# Altium PCB 主板-双BH.PcbDoc (part 4 of 4)
Units mm, origin at the board's own origin, x right, y up, seen from the top; angles counter-clockwise.
Board outline 97.69 x 103.45 mm, 2 copper layers (Top Layer, Bottom Layer); 79 components, 77 nets, 266 pads, 287 vias.
Unrouted connection lines stored in the file: 7.
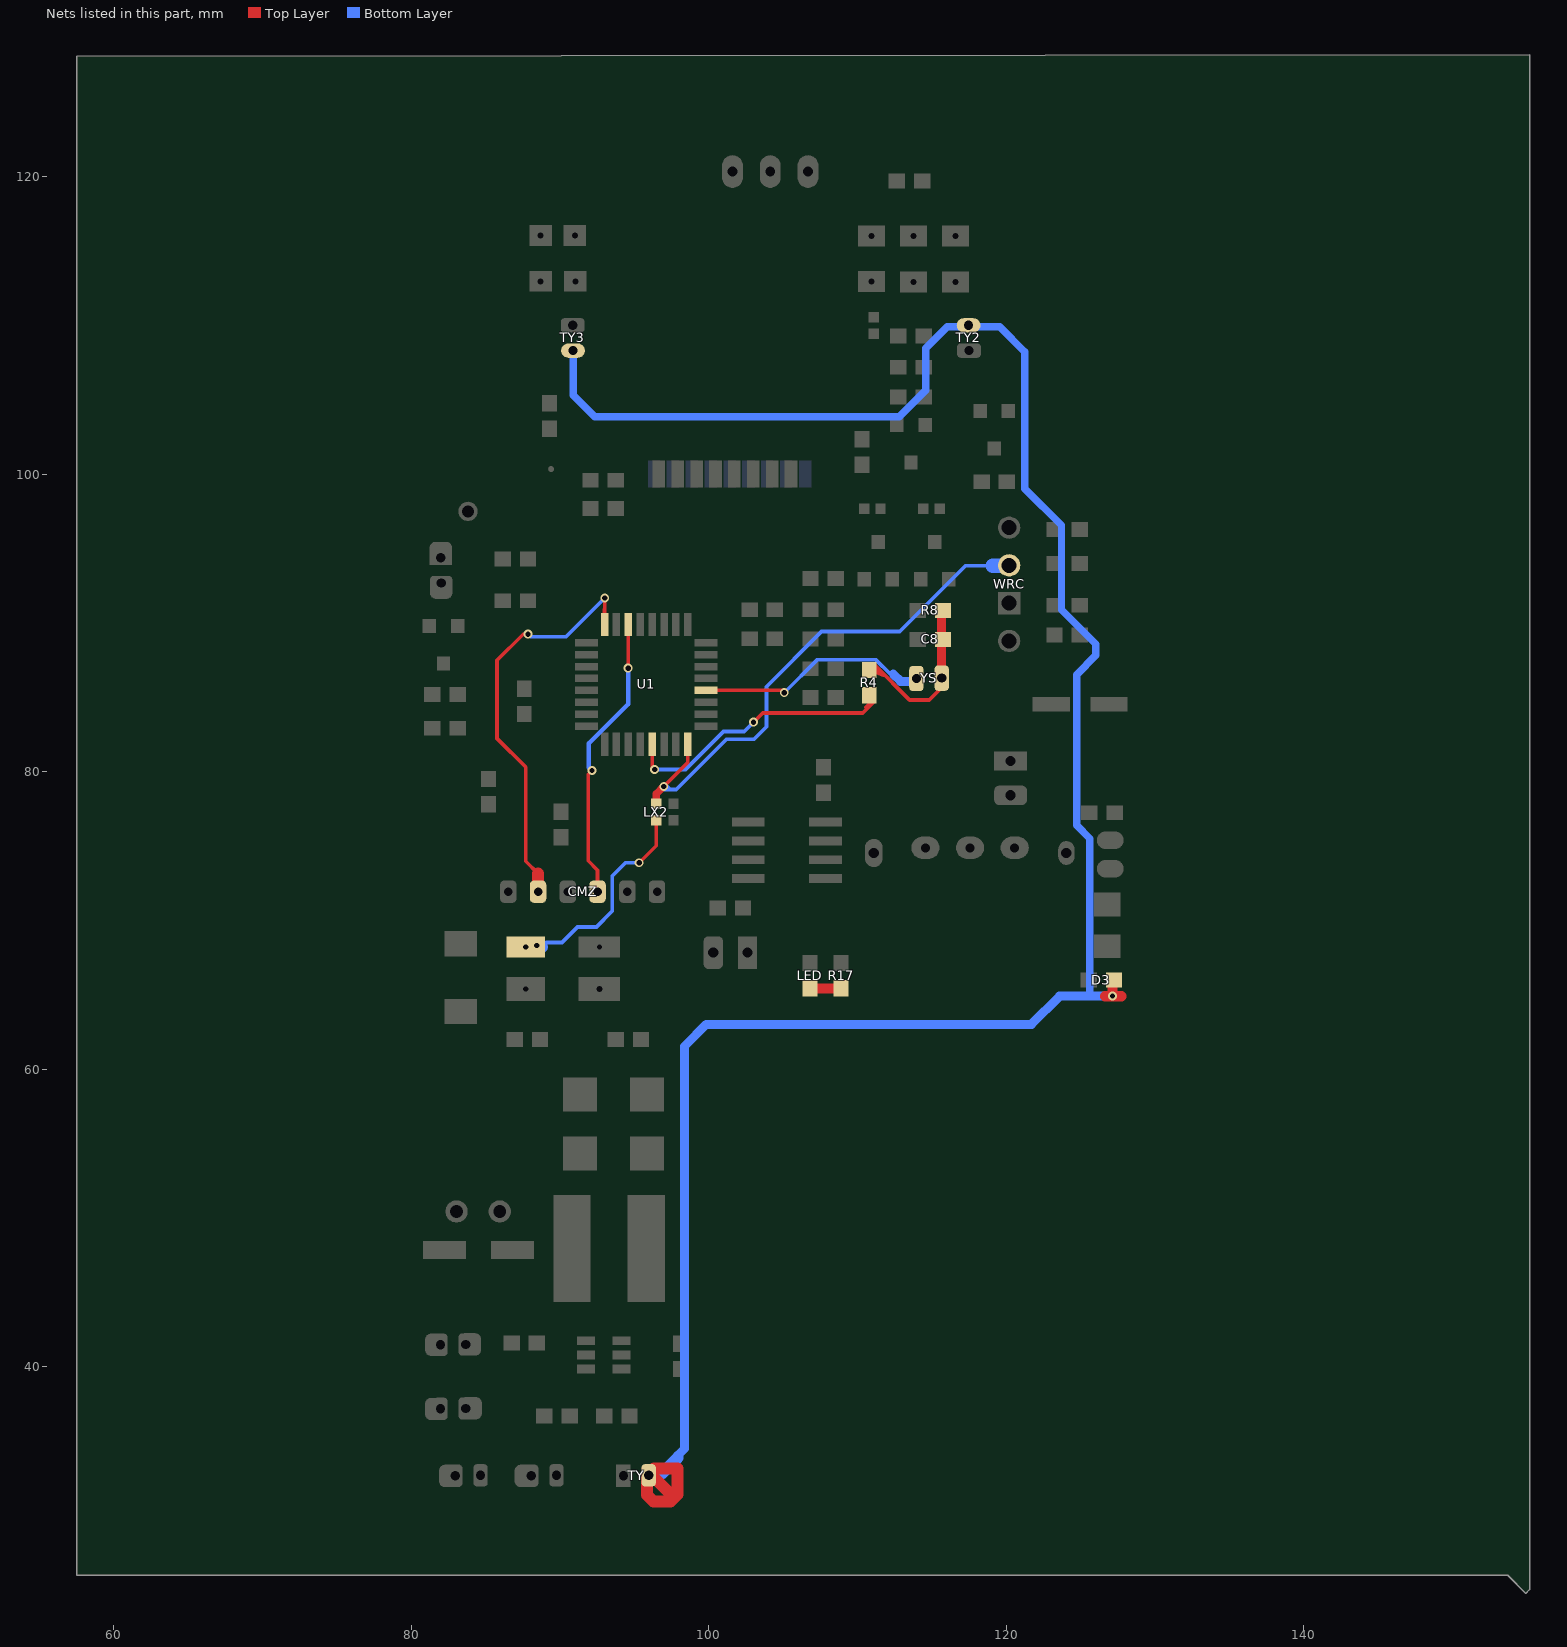
[diagram p4: the nets of this part, all layers, seen from the top]

## Via types
v1: diameter 0.6, hole 0.35, Top Layer to Bottom Layer, 106 vias
v2: diameter 0.7, hole 0.4, Top Layer to Bottom Layer, 104 vias
v3: diameter 0.8, hole 0.5, Top Layer to Bottom Layer, tented both sides, 35 vias
v4: diameter 0.8, hole 0.5, Top Layer to Bottom Layer, 16 vias
v5: diameter 1, hole 0.75, Top Layer to Bottom Layer, tented both sides, 5 vias
v6: diameter 3.4, hole 2.9, Top Layer to Bottom Layer, 4 vias
v7: diameter 1, hole 0.6, Top Layer to Bottom Layer, tented both sides, 3 vias
v8: diameter 0.65, hole 0.4, Top Layer to Bottom Layer, tented both sides, 2 vias
v9: diameter 0.8, hole 0.35, Top Layer to Bottom Layer, 2 vias
v10: diameter 0.7, hole 0.35, Top Layer to Bottom Layer, 2 vias
v11: diameter 1.1, hole 0.68, Top Layer to Bottom Layer, 2 vias
v12: diameter 1, hole 0.56, Top Layer to Bottom Layer, tented both sides, 2 vias
v13: diameter 0.62, hole 0.4, Top Layer to Bottom Layer, 1 vias
v14: diameter 0.95, hole 0.5, Top Layer to Bottom Layer, 1 vias
v15: diameter 0.7, hole 0.4, Top Layer to Bottom Layer, tented bottom, 1 vias
v16: diameter 0.8, hole 0.5, Top Layer to Bottom Layer, tented bottom, 1 vias

## Nets (pads, with @x,y where several pads share a name; then routed paths per layer and width w, separated by ;. In a path a pad name is that pad's centre, name@x,y a point inside that pad or via, vN(x,y) a via of type N, cw(c..) or ccw(c..) an arc to the next point about the centre after c; other vN are vias at no path point) (continued)
SWIM: LX2.1 LX2.2 pad.0@87.7,68.222 U1.32 WRC.3 | length 50.8
  Top Layer w0.254: v1(95.326,73.889) 96.469,75.032 LX2.1@96.469,76.742 ; v1(96.977,79.019) 98.6,80.642 U1.32@98.6,81.852
  Top Layer w0.5: LX2.2@96.469,77.842 96.469,78.511 v1(96.977,79.019)
  Bottom Layer w0.254: 89.103,68.529 90.145,68.529 91.186,69.571 92.456,69.571 93.523,70.637 93.523,73 94.412,73.889 v1(95.326,73.889) ; v1(96.977,79.019) 96.977,78.816 97.823,78.816 101.201,82.194 103.048,82.194 103.886,83.033 103.886,85.725 107.594,89.433 112.801,89.433 112.841,89.433 117.261,93.853 119.126,93.853 ; v1@97.104,79.121 97.358,78.867
  Bottom Layer w0.8: pad.0@87.6,68.182 pad.0@87.968,68.182 ; pad.0@87.986,68.199 88.773,68.199 pad.0@88.809,68.235
  Bottom Layer w1: 119.126,93.853 WRC.3@120.2,93.853
  other v9: 88.443,68.326
SWIM/BT: 
T-LED: LED.1 R17.1 | length 1.7
  Top Layer w0.7: LED.1@106.909,65.583 107.061,65.43 R17.1@108.58,65.43
TEMP: 
TY: D3.2 TY2.1 TY3.1 TY.1 | length 158.9
  Top Layer w0.7: 126.644,64.922 127.737,64.922 ; v1(127.15,64.92) D3.2@127.15,66
  Top Layer w0.8: TY.1@96.319,33.172 97.917,33.172 97.917,31.42 97.681,31.183 ; 97.681,31.183 97.444,30.947 96.282,30.947 95.86,31.369 95.86,33.004 97.681,31.183
  Bottom Layer w0.5: TY3.1@90.881,108.419 90.881,105.308 92.329,103.861 112.801,103.861 114.605,105.664 114.605,108.483 116.041,109.919 119.57,109.919 121.26,108.229 121.26,99.035 123.723,96.571 123.723,90.907 126.035,88.595 126.035,87.833 124.739,86.538 124.739,76.403 125.628,75.514 125.628,64.922 ; 125.882,64.922 125.885,64.92 v1(127.15,64.92)
  Bottom Layer w0.6: 97.917,33.884 97.917,34.033 98.374,34.49 98.374,61.544 99.847,63.017 121.691,63.017 123.596,64.922 v1@127.15,64.922
  Bottom Layer w0.8: TY.1@96.064,32.8 96.808,32.8 ; 96.808,32.775 97.917,33.884
Y30: CMZ.6 U1.16 | length 27.6
  Top Layer w0.254: v1(87.859,89.256) 87.528,89.256 85.776,87.503 85.776,82.245 87.706,80.315 87.706,75.006 87.706,73.99 88.53,73.166 ; U1.16@93,89.902 93,90.917 93.015,90.932 v1(93.015,91.694)
  Top Layer w0.8: CMZ.6@88.53,71.944 88.53,73.166
  Bottom Layer w0.254: v1(87.859,89.256) 88.036,89.078 90.399,89.078 v1(93.015,91.694)
Y30-D: 
Y>: CMZ.4 U1.14 | length 19.3
  Top Layer w0.254: v1@91.999,79.934 91.897,79.832 91.897,74.016 92.53,73.383 CMZ.4@92.53,71.944 ; v1@94.6,86.97 U1.14@94.6,89.902
  Bottom Layer w0.3: v1(92.151,80.086) 91.948,80.289 91.948,81.915 94.59,84.557 v1(94.59,86.97)
YS: C8.2 R4.1 R8.1 YS.1 | length 11.7
  Top Layer w0.254: R4.1@110.846,87.147 111.201,87.147 113.513,84.836 114.833,84.836 115.664,85.667 YS.1@115.664,86.075 ; 111.328,86.817 111.133,86.736 111.735,86.487
  Top Layer w0.6: YS.1@115.664,86.6 R8.1@115.664,90.881
YS-U: R4.2 U1.29 | length 19.8
  Top Layer w0.254: U1.29@96.2,81.853 96.2,80.304 v1@96.393,80.112 ; v1(103.022,83.337) 103.632,83.947 110.363,83.947 110.753,84.337 ; R4.2@110.8,85.15 110.8,84.574 110.563,84.337 110.753,84.337 ; R4.2@111.1,84.734 R4.2@111.125,84.709 ; R4.2@111.125,84.912 R4.2@111.125,84.709 ; 110.753,84.337 R4.2@111.125,84.709
  Bottom Layer w0.254: v1(96.368,80.162) 98.45,80.162 100.99,82.702 102.387,82.702 v1(103.022,83.337)
YS_D: U1.4 YS.2 | length 15.7
  Top Layer w0.254: U1.4@99.825,85.478 104.932,85.471 v1(105.081,85.321)
  Bottom Layer w0.254: v1(105.081,85.321) 107.289,87.528 111.252,87.528 112.206,86.574 112.409,86.574
  Bottom Layer w0.6: 112.409,86.574 112.903,86.081 YS.2@113.995,86.081
ZFKZ: 
pads on no net: Q1.1@110.454,92.95 U4.6
copper on no net:
  other v6: 82.557,57.679 125.775,60.079 89.13,119.579 119.262,119.579

## Polygon pours and split planes (outlines as drawn)
GND on Top Layer "Top Layer-No Net" (hatched 90Degree grid 0.508 track 0.203, remove dead copper, pour order 4): 81.276,30.218 80.78,30.218 80.569,30.429 80,30.998 80,31.494 80,48.768 86.157,48.768 86.157,51.46 85.75,51.867 85.75,52.095 80.025,52.095 80,52.121 80,53.645 85.014,53.645 85.268,53.899 86.385,55.016 86.385,55.321 86.385,60.96 86.233,61.112 84.938,62.408 80.086,62.408 80.086,97.143 80,97.229 81.45,98.679 83.185,98.679 83.185,98.704 84.709,100.228 84.861,100.076 86,100.076 86,115.286 86.03,115.316 86.047,115.333 91.825,115.333 91.825,104.238 92.964,103.099 93.701,103.835 113.055,103.835 113.055,104.038 113.614,104.597 113.589,104.623 113.589,113.614 122.199,113.614 122.276,113.69 122.311,113.655 122.311,99.862 124.064,99.862 125.552,98.374 125.603,98.425 126.695,98.425 127.071,98.425 128.5,96.996 128.5,59.415 128.5,58.447 127.864,57.81 127.508,57.455 127.127,57.455 124.282,57.455 124.206,57.379 123.52,58.064 123.088,58.064 123.088,58.674 122.733,59.03 122.733,61.29 121.996,62.027 121.923,62.1 121.53,62.1 100.613,62.1 100.584,62.128 100.508,62.052 100,62.052 99.924,62.052 99.238,61.366 99,61.129 99,60.123 99,31.5 98.984,31.484 98.984,30.836 98.933,30.836 98.4,30.302 98.316,30.218 97.726,30.218 81.276,30.218
GND on Bottom Layer "Top Layer-No Net" (solid, remove dead copper, pour order 3): 81.193,30.16 80.697,30.16 80.486,30.371 79.917,30.94 79.917,31.436 79.917,48.71 86.074,48.71 86.074,51.402 85.667,51.809 85.667,52.037 79.942,52.037 79.917,52.063 79.917,53.587 84.931,53.587 85.185,53.841 86.302,54.958 86.302,55.263 86.302,60.902 86.15,61.054 84.855,62.35 80.003,62.35 80.003,97.084 79.917,97.171 81.367,98.621 83.102,98.621 83.102,98.646 84.626,100.17 84.778,100.018 85.917,100.018 85.917,115.228 85.947,115.258 85.964,115.275 91.742,115.275 91.742,104.179 92.881,103.04 93.618,103.777 112.972,103.777 112.972,103.98 113.531,104.539 113.506,104.564 113.506,113.556 122.116,113.556 122.193,113.632 122.228,113.597 122.228,99.804 123.981,99.804 125.469,98.316 125.52,98.367 126.612,98.367 126.988,98.367 128.417,96.938 128.417,59.357 128.417,58.389 127.781,57.752 127.425,57.397 127.044,57.397 124.199,57.397 124.123,57.32 123.437,58.006 123.005,58.006 123.005,58.616 122.65,58.971 122.65,61.232 121.913,61.969 121.84,62.042 121.447,62.042 100.53,62.042 100.501,62.07 100.425,61.994 99.917,61.994 99.841,61.994 99.155,61.308 98.917,61.07 98.917,60.065 98.917,31.442 98.901,31.426 98.901,30.777 98.85,30.777 98.317,30.244 98.233,30.16 97.643,30.16 81.193,30.16

## Keep-outs
Keep-Out Layer:
  circle w0.1: c89.13,119.579 r1.45
  circle w0.1: c119.262,119.579 r1.45
  circle w0.1: c82.557,57.679 r1.45
  lines w0.1: 80,58.793 80,78.216 cw(c80.562,78.216) 80.562,78.778 ; 80,59.154 80,31.494 ccw(c81.276,31.494) 81.276,30.218 97.726,30.218 ccw(c97.718,31.5) 99,31.5 99,60.123 cw(c100.977,60.123) 100.977,62.1 121.53,62.1 cw(c121.53,60.884) 122.746,60.884 122.746,59.436 ccw(c124.8,59.436) 124.8,57.382 ; 80,81.955 80,97.229 85.95,99.929 86,99.979 86,119.634 cw(c88.245,119.634) 88.245,121.879 ; 80.01,81.955 ccw(c80.626,81.955) 80.626,81.339 ; 80.562,78.779 83,78.779 ; 80.626,81.339 83,81.339 ; 83,78.809 83,81.309 ; 86,66.2 94.4,66.2 ; 86,66.232 86,67.462 ; 86,67.502 94.4,67.502 ; 88.195,121.879 90.922,121.879 92.431,120.371 99.187,120.371 100.695,121.879 107.458,121.879 108.737,120.599 111.76,120.599 113.04,121.879 120.141,121.879 ; 94.4,66.232 94.4,67.462 ; 119.941,121.879 cw(c119.941,119.57) 122.25,119.57 122.25,100.029 122.311,99.862 128.5,96.996 128.5,81.869 ; 124.8,57.382 126.467,57.382 ccw(c126.467,59.415) 128.5,59.415 128.5,78.096 ; 125.48,78.809 125.48,81.309 ; 125.495,78.779 127.787,78.779 ; 125.495,81.339 127.94,81.339 ccw(c127.94,81.899) 128.5,81.899 ; 127.787,78.779 cw(c127.787,78.066) 128.5,78.066 ; 87.757,113.673 87.757,115.333 91.825,115.333 91.825,113.673 87.757,113.673 ; 93.218,106.274 94.005,105.486 107.442,105.486 108.356,106.401 108.356,117.043 107.239,118.161 94.082,118.161 93.218,117.297 93.218,106.274 ; 109.728,113.673 109.728,115.333 118.085,115.333 118.085,113.673 109.728,113.673
  lines w0.15: 89.789,65.801 89.789,64.668 90.246,64.668

## Other copper
Top Layer:
  rectangle net NetC4_1: 98.4,67.054 100.046,70.714
  rectangle net NetC4_1: 99.314,65.049 100.635,69.139
  rectangle net NetC4_1: 100.178,65.634 101.194,76.835
  rectangle net NetC4_2: 103.581,65.405 105.029,69.825
  rectangle net NetC4_2: 102.189,65.583 103.759,74.143
  rectangle net 8.4V: 120.32,68.859 122.346,75.566
  rectangle net 8.4V: 120.345,73.406 122.174,75.514
  rectangle net BT: 121.488,76.759 122.453,78.867
  rectangle net BT: 115.087,65.938 118.059,73.203
  rectangle net BT: 113.817,72.542 117.983,77.14
  rectangle net GND: 106.248,80.493 118.415,82.525
  rectangle net GND: 118.262,80.01 124.003,82.88
  rectangle net BT: 106.985,76.759 121.641,78.765
  rectangle net NetC4_1: 100.635,75.082 103.149,76.632
  rectangle net BT: 114.122,63.83 116.967,66.116
  rectangle net GND: 86.563,36.373 88.951,38.622
  rectangle net GND: 87.249,38.658 89.75,40.615
  rectangle net 5V: 86.258,51.943 87.884,54.381
  rectangle net GND: 101.6,77.902 105.125,81.686
  rectangle net 5V: 89.764,42.367 91.008,45.009
  region net GND: 94.844,32.207 94.844,35.027 89.306,35.027 89.306,32.207
  rectangle net TY: 95.961,31.191 97.917,33.198
  rectangle net GND: 89.256,31.42 93.37,33.985
Bottom Layer:
  rectangle net NetC4_1: 99.136,66.116 100.584,67.513
  rectangle net GND: 108.001,70.256 112.37,71.399
  rectangle net GND: 110.236,70.841 112.42,72.111
  rectangle net GND: 100.381,79.781 101.638,80.645
  rectangle net GND: 99.873,78.562 101.625,80.315
  rectangle net GND: 101.346,78.562 105.207,81.61
  rectangle net GND: 109.118,64.338 112.624,66.116
  rectangle net BT: 114.757,68.402 117.526,70.688
  rectangle net GND: 85.95,43.917 88.138,54.356
  rectangle net NetC4_1: 98.273,67.513 98.781,68.428
  rectangle net NetC4_1: 98.654,66.98 100.99,68.834
  rectangle net NetC4_1: 100.279,66.167 100.94,70.51
  rectangle net NetC4_2: 102.159,68.123 103.683,71.399
  rectangle net NetC4_2: 102.21,65.862 105.131,69.393
  rectangle net GND: 85.725,39.243 89.421,40.945
  rectangle net BT: 115.087,68.758 117.907,72.822
  rectangle net 8.4V: 119.583,68.682 122.301,74.447
  rectangle net 8.4V: 120.32,73.406 122.606,75.717
  rectangle net BT: 114.833,73.914 117.704,77.572
  rectangle net GND: 104.572,79.223 106.172,81.432
  rectangle net GND: 105.639,80.315 121.488,82.499
  rectangle net BT: 106.832,77.013 121.742,78.842
  rectangle net GND: 106.07,100.432 107.798,102.464
  rectangle net GND: 86.106,63.373 88.951,64.643
  rectangle net GND: 89.023,37.059 91.08,40.437
  rectangle net GND: 87.173,36.322 94.59,43.104
  rectangle net GND: 87.325,41.91 92.481,62.992
  rectangle net GND: 91.262,51.283 94.894,63.703
  rectangle net GND: 94.234,42.164 95.25,52.502
  rectangle net GND: 86.081,52.426 89.103,54.204

## Silkscreen, mask and mechanical layers (free items; w line width, h text height)
Top Overlay:
  circle w0.16: c125.175,84.532 r2.5
  circle w0.18: c84.556,47.93 r3.15
  lines w0.16: 109.626,97.003 112.344,97.003 112.344,98.45 109.626,98.45 109.626,97.003 ; 110.338,108.737 110.338,111.277 111.836,111.277 111.836,108.737 110.338,108.737 ; 113.665,97.003 116.307,97.003 116.307,98.45 113.665,98.45 113.665,97.003
  lines w0.2: 94.894,102.006 94.894,105.08 ; 94.894,118.389 94.894,120.142 ; 107.29,101.776 107.29,105.029
  lines w0.22: 92.964,30.48 96.749,30.48 ; 117.096,63.629 120.5,63.629 ; 117.125,63.598 117.125,68.729 ; 117.125,68.727 111.121,68.727 111.121,76.116 123.999,76.116 ; 120.5,63.598 120.5,68.729 ; 120.525,68.729 123.973,68.727 123.973,76.116 ; 122.475,81.748 127.825,81.748 ; 122.475,81.823 122.475,85.95 123.778,87.253 ; 123.825,87.273 127.85,87.273 127.85,81.773 ; 127.85,81.779 127.875,81.804 ; 81.198,46.488 81.198,51.219 87.924,51.219 87.917,44.619 83.067,44.619 81.198,46.488
  text "G-" at 97.739,118.745 h1.3
  text "-R" at 108.331,118.72 h1.3
  text "BC2" at 92.939,116.611 h0.85 r90
  text "OUT1" at 87.325,116.103 h0.85 r90
  text "GND" at 119.482,113.335 h1 r90
  text "HWPOW" at 109.601,112.37 h0.9 r90
  text "BC1" at 87.376,111.938 h0.9 r90
  text "M1" at 92.354,99.314 h1.6
  text "GND" at 84.861,97.155 h0.9
  text "CE" at 99.67,96.698 h0.9 r90
  text "IRQ" at 106.045,95.936 h0.9 r90
  text "3V3" at 97.028,95.809 h0.9 r90
  text "GND" at 98.374,95.809 h0.9 r90
  text "SCK" at 102.184,95.733 h0.9 r90
  text "CSN" at 100.889,95.656 h0.9 r90
  text "MOSI" at 103.429,95.148 h0.9 r90
  text "MISO" at 104.699,95.047 h0.9 r90
  text "16" at 92.38,89.637 h0.7 r90
  text "RST" at 119.151,86.309 h0.8
  text "+" at 120.066,83.642 h1.8
  text "1" at 100.609,81.661 h0.8
  text "+" at 122.885,77.318 h2.5
  text "+" at 117.323,77.14 h2.5
  text "+" at 112.395,76.886 h2.5
  text "AM" at 90.957,73.889 h1 r90
  text "GN" at 97.028,73.812 h1 r90
  text "3.3V" at 87.122,73.787 h1 r90
  text "Y30" at 88.951,73.787 h1 r90
  text "Y>" at 92.989,73.787 h1 r90
  text "<Z" at 94.996,73.762 h1 r90
  text "NTC" at 125.603,73.177 h0.8 r90
  text "-" at 125.806,71.145 h2.3
  text "8.4V" at 121.818,69.672 h1 r90
  text "SWIM" at 86.309,69.367 h0.8
  text "RST" at 91.796,69.291 h0.8
  text "BAT" at 116.281,65.354 h1 r90
  text "+" at 96.19,64.999 h2
  text "5V" at 89.383,62.941 h1
  text "+" at 92.024,62.433 h2
  text "-" at 86.665,62.306 h2.2
  text "+" at 80,44.628 h2
  text "+" at 97.257,34.696 h1.5 r90
Bottom Overlay:
  circle w0.2: c84.497,49.733 r2.6
  lines w0.16: 95.021,101.776 95.021,105.181 ; 96.19,95.123 96.19,93.32 96.596,92.913 104.75,92.913 105.105,93.269 105.105,95.199 ; 97.46,95.199 97.46,93.751 97.485,93.726 106.553,93.726 106.655,93.828 106.655,95.275 ; 98.6,70.028 98.6,63.119 104.369,63.119 104.369,69.875 104.521,70.028 98.628,70.028 ; 106.756,101.879 106.756,105.054
  lines w0.25: 96.063,101.956 96.063,105.029 ; 108.001,101.802 108.001,105.054
  lines w0.254: 90.932,117.069 92.024,118.161 ; 91.592,110.846 92.685,111.938 ; 91.618,111.938 92.71,110.846
  text "-G" at 99.898,118.643 h1.2
  text "38BC2" at 95.021,118.593 h0.8
  text "R-" at 110.211,118.567 h1.2
  text "38OUT" at 87.401,118.186 h0.8 r90
  text "HWPOW" at 109.576,116.713 h0.9 r90
  text "GND" at 119.609,115.976 h1 r90
  text "38BC1" at 87.452,113.309 h0.8 r90
  text "FL" at 114.427,110.414 h1.2
  text "SCK" at 101.778,98.146 h0.9 r90
  text "GND" at 107.213,98.12 h0.9 r90
  text "IRQ" at 97.917,98.095 h0.9 r90
  text "3V3" at 105.664,98.095 h0.9 r90
  text "MISO" at 99.212,98.069 h0.9 r90
  text "CE" at 104.343,98.069 h0.9 r90
  text "GND" at 85.115,98.044 h1 r180
  text "CSN" at 103.048,98.044 h0.9 r90
  text "GND" at 96.698,98.019 h0.9 r90
  text "MOSI" at 100.482,97.993 h0.9 r90
  text "3.3" at 118.796,95.936 h1
  text "SWIM" at 118.847,93.32 h1
  text "GND" at 118.593,90.932 h1
  text "RST" at 118.415,88.265 h1
  text "YS" at 112.192,85.395 h1.5
  text "BT" at 121.031,84.531 h1.5 r90
  text "+" at 123.469,77.394 h2
  text "3.3V" at 86.131,73.66 h1 r270
  text "8.4V" at 121.818,73.482 h1 r90
  text "GND" at 96.012,73.457 h1 r270
  text "BT" at 117.018,71.984 h1.4
  text "GND" at 86.004,64.11 h1.15 r180
  text "MO" at 107.544,63.652 h1.5
  text "+" at 93.37,62.255 h2.2
  text "DC 5V" at 93.091,60.681 h1.2
  text "2000MA" at 93.701,58.699 h1.2
  text "C1" at 85.166,53.315 h1.2
  text "+" at 81.458,48.87 h1.8
  text "201901001CCHF" at 90.475,43.028 h1 r270
  text "BH1" at 88.367,40.996 h1.2
  text "BH2" at 88.646,36.754 h1.2
  text "BC2" at 92.151,34.468 h1.2 r90
  text "BC1" at 81.864,34.265 h1.2 r90
  text "TY" at 98.349,33.731 h1.2 r90
Top Solder:
  lines w0.7: 103.048,76.683 101.041,76.683 ; 101.041,76.683 100.373,76.683 99.72,76.03 99.72,73.152 100.355,73.787 100.355,75.997 101.041,76.683
  lines w1: 102.26,75.616 102.26,76.505 ; 102.286,72.949 102.286,73.889